# Altium PCB PCB1.PcbDoc (part 2 of 2)
Units mm, origin at the board's own origin, x right, y up, seen from the top; angles counter-clockwise.
Board outline 95 x 95 mm, 2 copper layers (Top Layer, Bottom Layer); 186 components, 106 nets, 634 pads, 261 vias.
Unrouted connection lines stored in the file: 17.
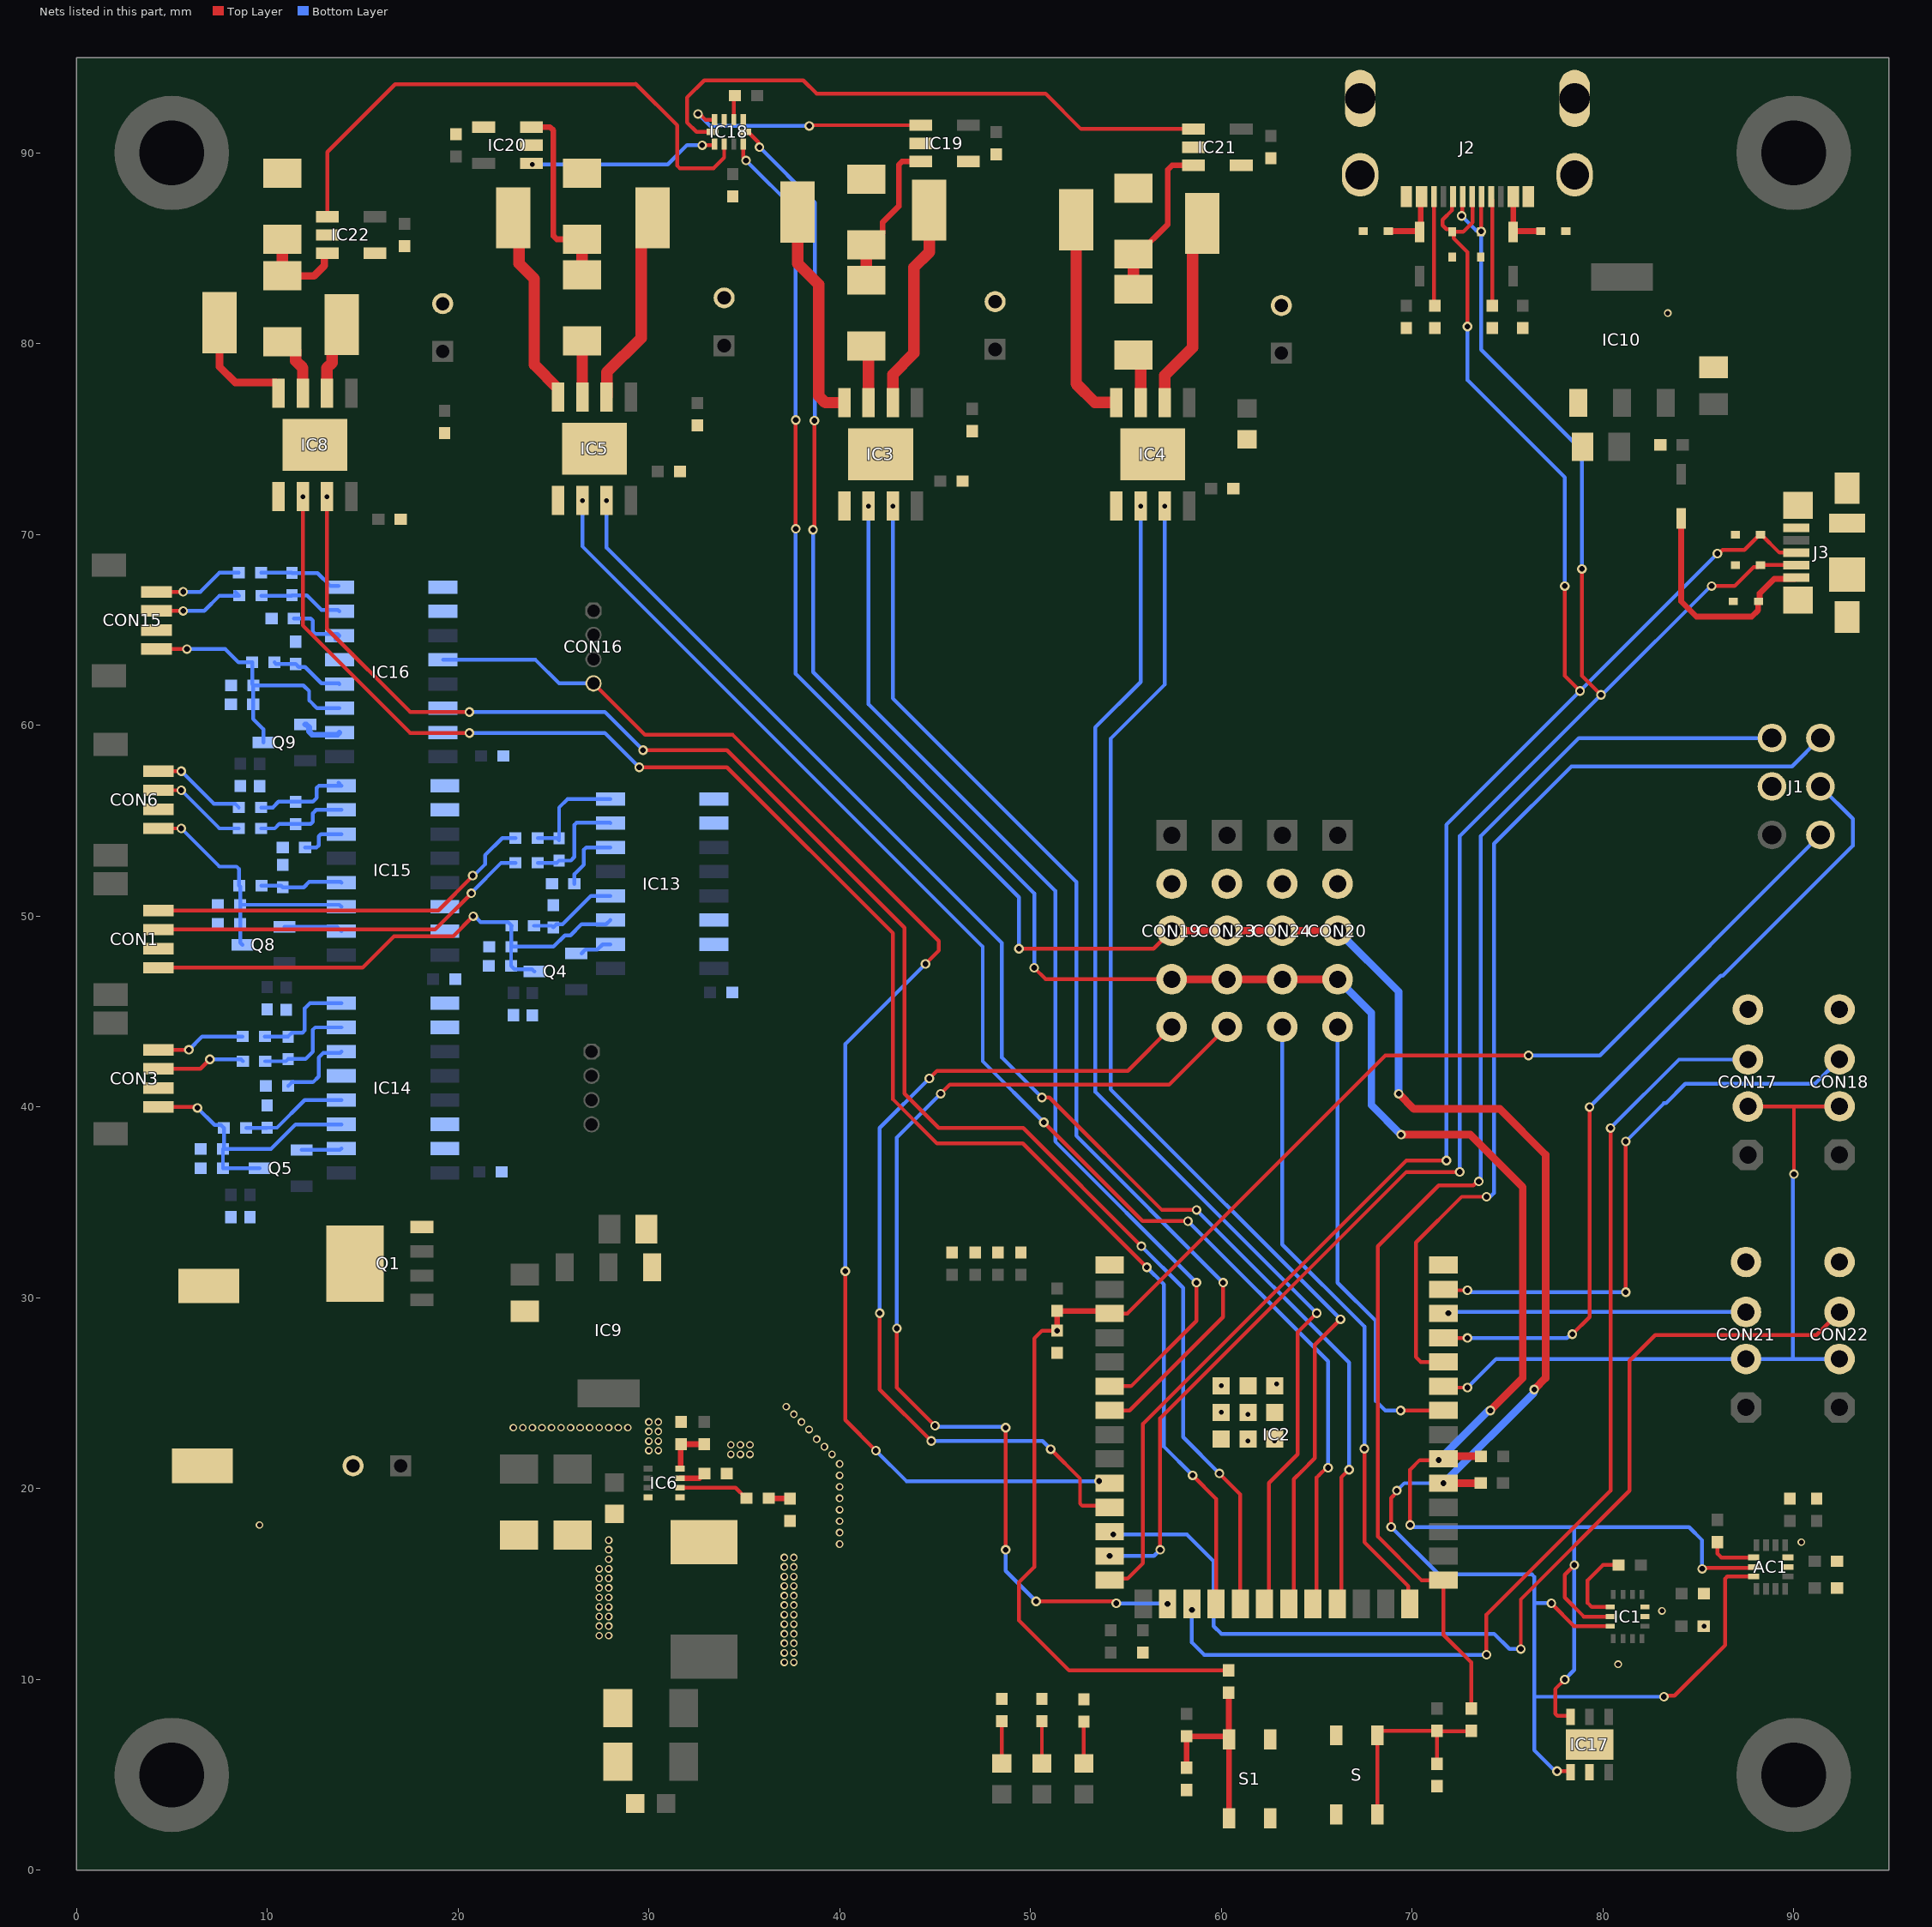
[diagram p2: the nets of this part, all layers, seen from the top]

## Via types
v1: diameter 0.5, hole 0.3, Top Layer to Bottom Layer, tented both sides, 150 vias
v2: diameter 0.4, hole 0.25, Top Layer to Bottom Layer, tented both sides, 110 vias
v3: diameter 0.6, hole 0.3, Top Layer to Bottom Layer, tented both sides, 1 vias

## Nets (pads, with @x,y where several pads share a name; then routed paths per layer and width w, separated by ;. In a path a pad name is that pad's centre, name@x,y a point inside that pad or via, vN(x,y) a via of type N, cw(c..) or ccw(c..) an arc to the next point about the centre after c; other vN are vias at no path point) (continued)
DAT4: CON16.4 IC2.10 IC16.12 | length 73.8
  Top Layer w0.2: CON16.4@27.1,62.2 29.8,59.5 34.4,59.5 45.2,48.7 45.2,48.2 v1(44.5,47.5) ; v1(40.3,31.4) 40.3,23.6 v1(41.9,22)
  Bottom Layer w0.2: IC16.12@19.212,63.435 24.065,63.435 25.3,62.2 CON16.4@27.1,62.2 ; v1(40.3,31.4) 40.3,43.3 v1(44.5,47.5) ; v1(41.9,22) 43.5,20.4 v1(53.6,20.4)
ECHO1: CON17.3 IC2.17 | length 56.4
  Top Layer w0.2: v1(73.9,11.3) 73.9,13.4 80.4,19.9 v1(80.4,38.9)
  Bottom Layer w0.2: v1(58.462,13.645) 58.462,11.938 59.1,11.3 v1(73.9,11.3) ; v1(80.4,38.9) 83.99,42.49 CON17.3@87.6,42.49
ECHO2: CON21.3 IC2.38 | length 15.6
  Bottom Layer w0.2: v1(71.9,29.2) 71.96,29.26 CON21.3@87.5,29.26
ECHO3: CON18.3 IC2.39 | length 30.5
  Top Layer w0.2: IC2.39@71.65,30.45 71.7,30.4 v1(72.9,30.4) ; v1(81.2,30.3) v1(81.2,38.2)
  Bottom Layer w0.2: v1(72.9,30.4) 72.981,30.4 73.081,30.3 v1(81.2,30.3) ; v1(81.2,38.2) 83.2,40.2 83.3,40.2 84.316,41.216 91.116,41.216 CON18.3@92.4,42.5
ECHO4: CON22.3 IC2.12 | length 55.4
  Top Layer w0.2: v1(75.7,11.6) 75.7,14.2 81.4,19.9 81.4,26.7 82.746,28.046 91.186,28.046 CON22.3@92.4,29.26
  Bottom Layer w0.2: v1(54.336,17.609) 54.345,17.6 58.2,17.6 59.6,16.2 59.6,12.8 60,12.4 74.3,12.4 75.1,11.6 v1(75.7,11.6)
EN: C26.1 IC2.3 J1.1 R5.1 R23.1 | length 80
  Top Layer w0.2: v1(51.4,28.284) 50.616,28.284 50.2,27.868 50.2,15.9 49.4,15.1 49.4,13.1 52.019,10.481 R23.1@60.387,10.481 ; IC2.3@54.15,29.18 54.153,29.183 55.083,29.183 68.6,42.7 v1(76.1,42.7)
  Top Layer w0.3: v1(51.4,28.284) 51.4,28.4 R5.1@51.4,29.316 54.014,29.316 IC2.3@54.15,29.18
  Bottom Layer w0.2: v1(76.1,42.7) 79.84,42.7 J1.1@91.4,54.26
GND: AC1.6 AC1.7 C1.2 C2.2 C3.2 C4.2 C6.2 C7.2 C8.2 C9.2 C10.2 C11.2 C12.2 C13.2 C14.2 C15.2 C16.2 C17.2 C18.2 C19.2 C20.2 C21.2 C22.2 C23.2 C24.2 C25.2 C26.2 C27.2 C28.2 C29.2 C30.2 C31.2 C32.2 C33.2 C34.2 C35.2 C36.2 C37.2 C38.2 C39.2 C40.2 C41.2 C42.2 C43.2 C44.2 C45.2 C46.2 C47.2 C48.1 C49.1 C52.2 C53.2 C54.2 C55.2 C56.2 C57.2 C58.2 C59.2 C60.1 C61.1 C64.1 C65.2 C66.2 C67.2 C68.2 C69.2 C70.2 CON1.2 CON3.2 CON6.2 CON14.1 CON15.2 CON17.4 CON18.4 CON19.2 CON20.2 CON21.4 CON22.4 CON23.2 CON24.2 D4.1 D5.1 D6.1 D7.1 D8.1 D9.1 D10.1 IC1.6 IC1.7 IC2.1 IC2.40 IC2.41 IC2.42 IC2.43 IC2.44 IC2.45 IC2.46 IC2.47 IC2.48 IC2.49 IC3.1 IC3.9 IC4.1 IC4.9 IC5.1 IC5.9 IC6.4 IC8.1 IC8.9 IC9.1 IC10.1 IC13.9 IC13.10 IC13.14 IC13.15 IC14.5 IC14.9 IC14.10 IC14.14 IC14.15 IC15.9 IC15.10 IC15.14 IC15.15 IC16.5 IC16.9 IC16.10 IC16.14 IC16.15 IC17.2 IC17.7 IC18.1 IC18.3 IC19.2 IC19.4 IC20.2 IC20.4 IC21.2 IC21.4 IC22.2 IC22.4 J1.4 J2.A1 J2.A12 J2.MH1 J2.MH2 J2.MH3 J2.MH4 J3.5 J3.MP1 J3.MP2 J3.MP3 J3.MP4 J3.MP5 J3.MP6 Q1.4 R3.1 R7.1 R8.1 R9.2 R10.2 R11.2 R12.1 R13.1 R14.2 R15.1 R18.1 R20.1 R21.1 R26.1 R27.1 R32.1 R33.1 R36.1 R37.1 S1.1 S1.2 S.1 S.2
  other v2: 80.8,10.8 37.1,10.9 37.6,10.9 37.1,11.4 37.6,11.4 37.1,11.9 37.6,11.9 27.4,12.3 27.9,12.3 37.1,12.4 37.6,12.4 27.4,12.8 27.9,12.8 85.3,12.8 37.1,12.9 37.6,12.9 27.4,13.3 27.9,13.3 37.1,13.4 37.6,13.4 83.1,13.6 27.4,13.8 27.9,13.8 37.1,13.9 37.6,13.9 27.4,14.3 27.9,14.3 37.1,14.4 37.6,14.4 27.4,14.8 27.9,14.8 37.1,14.9 37.6,14.9 27.4,15.3 27.9,15.3 37.1,15.4 37.6,15.4 27.4,15.8 27.9,15.8 37.1,15.9 37.6,15.9 27.9,16.3 37.1,16.4 37.6,16.4 27.9,16.8 40,17.1 90.4,17.2 27.9,17.3 40,17.7 9.6,18.1 40,18.3 40,18.9 40,19.5 40,20.1 40,20.7 40,21.3 34.3,21.8 34.8,21.8 35.3,21.8 39.6,21.8 30,22 30.5,22 39.2,22.2 34.3,22.3 34.8,22.3 35.3,22.3 30,22.5 30.5,22.5 61.4,22.5 62.8,22.5 38.8,22.6 30,23 30.5,23 38.4,23.1 22.9,23.2 23.4,23.2 23.9,23.2 24.4,23.2 24.9,23.2 25.4,23.2 25.9,23.2 26.4,23.2 26.9,23.2 27.4,23.2 27.9,23.2 28.4,23.2 28.9,23.2 30,23.5 30.5,23.5 38,23.5 37.6,23.9 61.4,23.9 60,24 37.2,24.3 60,25.4 62.9,25.5 83.4,81.6
I1: IC18.4 IC19.1 | length 12.9
  Top Layer w0.2: v1(32.58,92.041) 32.661,92.041 32.964,91.738 IC18.4@33.45,91.738 ; v1(38.413,91.412) 38.451,91.45 IC19.1@44.25,91.45
  Bottom Layer w0.2: v1(32.58,92.041) 33.208,91.412 v1(38.413,91.412)
I2: IC18.5 IC21.1 | length 30.8
  Top Layer w0.2: IC18.5@33.34,91.1 32.5,91.1 32,91.6 32,92.9 32.9,93.8 38.1,93.8 38.8,93.1 50.8,93.1 52.65,91.25 IC21.1@58.55,91.25
I3: IC18.6 IC20.1 | length 10
  Top Layer w0.2: v1(32.8,90.4) 33.4,90.4 33.45,90.45 IC18.6@33.45,90.462
  Bottom Layer w0.2: v2(23.9,89.4) 31,89.4 32,90.4 v1(32.8,90.4)
I4: IC18.7 IC22.1 | length 29.7
  Top Layer w0.2: IC22.1@13.15,86.65 13.15,90.05 16.7,93.6 29.3,93.6 29.317,93.617 31.5,91.434 31.5,89.317 31.617,89.2 33.4,89.2 33.95,89.75 IC18.7@33.95,90.462
IO0: IC2.27 J1.6 R22.1 | length 69.2
  Top Layer w0.2: R22.1@73.1,8.484 73.1,10.9 71.65,12.35 IC2.27@71.65,15.21 70.49,15.21 68.2,17.5 68.2,32.7 71.4,35.9 73.219,35.9 73.419,36.1 v1(73.5,36.1)
  Bottom Layer w0.2: v1(73.5,36.1) 73.6,36.2 73.6,54.2 78.74,59.34 J1.6@88.86,59.34
NetAC1_12: AC1.12 R47.1 | length 2.6
  Top Layer w0.2: R47.1@86,17.2 86,16.6 86.2,16.4 AC1.12@87.9,16.4
NetC4_1: C4.1 IC6.7 | length 1.4
  Top Layer w0.3: IC6.7@31.638,20.55 32.648,20.55 32.898,20.8 C4.1@32.916,20.8
NetC5_1: C5.1 R4.1 | length 1.1
  Top Layer w0.3: R4.1@36.284,19.5 36.292,19.492 37.392,19.492 C5.1@37.4,19.484
NetC5_2: C5.2 IC6.5 L1.1
NetC27_1: C27.1 R16.1 R22.2 S.3 S.4 | length 10.9
  Top Layer w0.2: S.3@68.175,2.925 68.175,7.091 68.4,7.316 R16.1@71.3,7.316 ; C27.1@71.3,5.584 71.3,7.298 73.083,7.298 R22.2@73.1,7.316
NetC31_1: C31.1 R17.1 R23.2 S1.3 S1.4 | length 10.3
  Top Layer w0.3: C31.1@58.188,5.381 R17.1@58.188,7.028 S1.3@60.256,7.028 ; R23.2@60.387,9.313 60.4,9.3 60.4,6.884 S1.3@60.413,6.872 S1.4@60.413,2.722
NetC44_1: C44.1 C45.1 CON1.1 IC13.3 Q4.3 R24.2 | length 29.1
  Top Layer w0.2: CON1.1@4.3,47.3 15,47.3 16.65,48.95 19.75,48.95 v1(20.8,50)
  Bottom Layer w0.2: v1(20.8,50) 20.881,50 21.181,49.7 22.616,49.7 R24.2@22.816,49.5 22.8,49.484 C45.1@22.8,48.4 ; Q4.3@24,47.1 23.883,47.217 22.967,47.217 C44.1@22.784,47.4 22.784,48.384 C45.1@22.8,48.4 ; IC13.3@27.988,49.795 27.766,49.573 26.473,49.573 25.9,49 25.6,49 25,48.4 C45.1@22.8,48.4
NetC46_1: C46.1 C47.1 CON3.1 IC14.3 Q5.3 R25.2 | length 14.7
  Top Layer w0.2: CON3.1@4.3,40 6.304,40 v1(6.349,39.955)
  Bottom Layer w0.2: v1(6.349,39.955) 7.247,39.057 7.574,39.057 R25.2@7.732,38.9 7.732,37.847 C46.1@7.684,37.8 ; Q5.3@9.6,36.8 C47.1@7.684,36.8 C46.1@7.684,37.8 ; IC14.3@13.888,39.095 11.495,39.095 10.2,37.8 C46.1@7.684,37.8
NetC48_2: C48.2 IC13.6 | length 3.4
  Bottom Layer w0.2: C48.2@26.1,51.7 26.1,52.2 26.6,52.7 26.6,53.488 26.717,53.605 IC13.6@27.988,53.605
NetC49_2: C49.2 IC14.6 | length 4.1
  Bottom Layer w0.2: C49.2@11.1,41.1 11.3,41.3 12.4,41.3 12.7,41.6 12.7,42.6 12.943,42.843 13.826,42.843 IC14.6@13.888,42.905
NetC50_1: C50.1 IC13.8 R30.1 | length 5.7
  Bottom Layer w0.2: R30.1@24.184,54.1 25.184,54.1 C50.1@25.3,53.984 ; C50.1@25.3,54.084 25.3,55.7 25.745,56.145 IC13.8@27.988,56.145
NetC50_2: C50.2 IC13.7 R28.1 | length 5.7
  Bottom Layer w0.2: R28.1@24.184,52.8 25.184,52.8 C50.2@25.3,52.916 25.916,52.916 26.1,53.1 26.1,54.783 26.217,54.9 27.963,54.9 IC13.7@27.988,54.875
NetC51_1: C51.1 IC14.8 R31.1 | length 5.4
  Bottom Layer w0.2: R31.1@9.884,43.7 11.084,43.7 C51.1@11.1,43.684 11.1,43.7 11.3,43.9 11.856,43.9 11.973,44.017 11.973,45.173 12.245,45.445 IC14.8@13.888,45.445
NetC51_2: C51.2 IC14.7 R29.1 | length 5.4
  Bottom Layer w0.2: R29.1@9.9,42.4 10.984,42.4 C51.2@11.1,42.516 12.016,42.516 12.4,42.9 12.4,44.058 12.517,44.175 IC14.7@13.888,44.175
NetC56_1: C56.1 C57.1 CON6.1 IC15.3 Q8.3 R34.2 | length 14.5
  Top Layer w0.2: CON6.1@4.3,54.6 v1(5.5,54.6)
  Bottom Layer w0.2: v1(5.5,54.6) 7.5,52.6 8.4,52.6 8.532,52.468 R34.2@8.532,51.6 8.584,51.547 C56.1@8.584,50.6 ; Q8.3@8.7,48.5 8.584,48.616 C57.1@8.584,49.6 C56.1@8.584,50.6 ; IC15.3@13.888,50.495 13.783,50.6 C56.1@8.584,50.6
NetC58_1: C58.1 C59.1 CON15.1 IC16.3 Q9.3 R35.2 | length 14.9
  Top Layer w0.2: CON15.1@4.3,64 v1(5.8,64)
  Bottom Layer w0.2: v1(5.8,64) 7.8,64 8.5,63.3 R35.2@9.216,63.3 9.216,62.168 C58.1@9.284,62.1 ; Q9.3@9.8,59.1 9.8,59.8 9.268,60.332 C59.1@9.268,61.1 9.268,62.084 C58.1@9.284,62.1 ; IC16.3@13.788,60.895 12.622,60.895 12.2,61.317 12.2,61.8 11.9,62.1 C58.1@9.284,62.1
NetC60_2: C60.2 IC15.6 | length 2.5
  Bottom Layer w0.2: C60.2@11.984,53.6 12.583,53.6 12.7,53.717 12.7,54.188 12.817,54.305 IC15.6@13.888,54.305
NetC61_2: C61.2 IC16.6 | length 3.4
  Bottom Layer w0.2: C61.2@11.4,65.6 12.283,65.6 12.4,65.483 12.4,64.917 12.517,64.8 13.693,64.8 IC16.6@13.788,64.705 IC16.6@13.583,64.5
NetC62_1: C62.1 IC15.8 R40.1 | length 5.2
  Bottom Layer w0.2: R40.1@9.684,55.7 10.3,55.7 10.6,56 C62.1@11.5,56 12.4,56 12.6,56.2 12.6,56.728 12.717,56.845 IC15.8@13.888,56.845 IC15.8@13.733,57
NetC62_2: C62.2 IC15.7 R38.1 | length 4.9
  Bottom Layer w0.2: R38.1@9.684,54.6 10.4,54.6 10.632,54.832 C62.2@11.5,54.832 12.283,54.832 12.4,54.949 12.4,55.4 12.575,55.575 IC15.7@13.888,55.575
NetC63_1: C63.1 IC16.8 R41.1 | length 4.3
  Bottom Layer w0.2: R41.1@9.684,68 11.284,68 C63.1@11.3,67.984 12.636,67.984 13.32,67.3 IC16.8@13.733,67.3
NetC63_2: C63.2 IC16.7 R39.1 | length 4.4
  Bottom Layer w0.2: R39.1@9.7,66.8 11.284,66.8 C63.2@11.3,66.816 12.084,66.816 12.843,66.057 13.706,66.057 IC16.7@13.788,65.975
NetCON1_3: CON1.3 R28.2 | length 20.2
  Top Layer w0.2: CON1.3@4.3,49.3 18.8,49.3 v1(20.7,51.2)
  Bottom Layer w0.2: v1(20.7,51.2) 20.7,51.234 22.266,52.8 R28.2@23.016,52.8
NetCON1_4: CON1.4 R30.2 | length 20.6
  Top Layer w0.2: CON1.4@4.3,50.3 18.969,50.3 20.773,52.104 v1(20.773,52.127)
  Bottom Layer w0.2: v1(20.773,52.127) 20.827,52.127 21.417,52.717 21.417,53.2 22.317,54.1 R30.2@23.016,54.1
NetCON2_1: CON2.1 IC3.8 | length 11.6
  Top Layer w0.6: CON2.1@37.8,86.9 37.8,84.2 38.9,83.1 38.9,77.263 39.251,76.912 IC3.8@40.245,76.912
NetCON3_3: CON3.3 R29.2 | length 4.7
  Top Layer w0.2: CON3.3@4.3,42 6.5,42 v1(7,42.5)
  Bottom Layer w0.2: v1(7,42.5) 8.632,42.5 R29.2@8.732,42.4
NetCON3_4: CON3.4 R31.2 | length 4.7
  Top Layer w0.2: CON3.4@4.3,43 v1(5.9,43)
  Bottom Layer w0.2: v1(5.9,43) 6.6,43.7 R31.2@8.716,43.7
NetCON4_1: CON4.1 Q1.5_8
NetCON6_3: CON6.3 R38.2 | length 5
  Top Layer w0.2: CON6.3@4.3,56.6 v1(5.5,56.6)
  Bottom Layer w0.2: v1(5.5,56.6) 7.5,54.6 R38.2@8.516,54.6
NetCON6_4: CON6.4 R40.2 | length 5
  Top Layer w0.2: CON6.4@4.3,57.6 v1(5.5,57.6)
  Bottom Layer w0.2: v1(5.5,57.6) 7.2,55.9 8.316,55.9 R40.2@8.516,55.7
NetCON7_1: CON7.1 IC3.6 | length 10.9
  Top Layer w0.6: IC3.6@42.785,76.912 42.785,78.385 43.9,79.5 43.9,84 44.7,84.8 CON7.1@44.7,87
NetCON8_1: CON8.1 IC4.8 | length 11.1
  Top Layer w0.6: CON8.1@52.4,86.5 52.4,77.9 53.382,76.918 IC4.8@54.506,76.918
NetCON9_1: CON9.1 IC4.6 | length 10.2
  Top Layer w0.6: IC4.6@57.046,76.918 57.046,78.346 58.5,79.8 58.5,85.8 CON9.1@59,86.3
NetCON10_1: CON10.1 IC5.8 | length 10.4
  Top Layer w0.6: CON10.1@22.9,86.6 23.2,86.3 23.2,84.2 24,83.4 24,78.895 25.245,77.649 IC5.8@25.245,77.212
NetCON11_1: CON11.1 IC5.6 | length 10.1
  Top Layer w0.6: IC5.6@27.785,77.212 27.81,77.237 27.81,78.51 29.6,80.3 CON11.1@29.6,86.6
NetCON12_1: CON12.1 IC8.8 | length 6.2
  Top Layer w0.4: CON12.1@7.5,81.1 7.5,78.8 8.325,77.975 10.47,77.975 10.595,77.85 IC8.8@10.595,77.412
NetCON13_1: CON13.1 IC8.6 | length 3.9
  Top Layer w0.6: IC8.6@13.135,77.412 13.135,78.735 13.399,78.999 13.399,80.499 CON13.1@13.9,81
NetCON15_3: CON15.3 R39.2 | length 4.8
  Top Layer w0.2: CON15.3@4.3,66 v1(5.6,66)
  Bottom Layer w0.2: v1(5.6,66) 6.7,66 7.5,66.8 R39.2@8.532,66.8 R39.2@8.332,67
NetCON15_4: CON15.4 R41.2 | length 4.6
  Top Layer w0.2: CON15.4@4.3,67 v1(5.6,67)
  Bottom Layer w0.2: v1(5.6,67) 6.5,67 7.5,68 R41.2@8.516,68
NetD1_2: D1.2 R12.2 | length 2.2
  Top Layer w0.2: D1.2@48.5,5.613 R12.2@48.5,7.816
NetD2_2: D2.2 R13.2 | length 2.2
  Top Layer w0.2: D2.2@52.8,5.613 R13.2@52.8,7.8
NetD3_2: D3.2 R15.2 | length 2.2
  Top Layer w0.2: D3.2@50.6,5.613 R15.2@50.6,7.816
NetD6_2: D6.2 IC12.2 J2.A9 | length 3.4
  Top Layer w0.3: D6.2@68.76,85.9 70.362,85.9 IC12.2@70.4,85.862 70.45,85.912 70.45,87.55 J2.A9@70.5,87.6
NetD7_2: D7.2 IC7.2 J2.A4 | length 3.2
  Top Layer w0.3: J2.A4@75.3,87.6 IC7.2@75.3,85.862 75.338,85.9 D7.2@76.74,85.9
NetD10_2: D10.2 IC11.2 J3.1 | length 12
  Top Layer w0.3: IC11.2@84.1,70.838 84.1,66.5 84.9,65.7 87.8,65.7 88.142,66.042 88.142,66.482 D10.2@88.16,66.5 88.168,66.5 88.218,66.55 88.218,66.918 88.975,67.675 90.065,67.675 J3.1@90.14,67.75
NetIC1_12: IC1.12 R48.1 | length 4.4
  Top Layer w0.2: IC1.12@80.387,13.8 79.417,13.8 79.2,14.017 79.2,15.2 80,16 R48.1@80.816,16
NetIC3_7: IC3.7 R43.1 | length 3
  Top Layer w0.6: R43.1@41.4,79.873 41.515,79.758 IC3.7@41.515,76.912
NetIC4_7: IC4.7 R45.1 | length 2.6
  Top Layer w0.6: R45.1@55.4,79.4 55.776,79.024 IC4.7@55.776,76.918
NetIC5_7: IC5.7 R44.1 | length 2.9
  Top Layer w0.6: R44.1@26.5,80.146 26.515,80.131 IC5.7@26.515,77.212
NetIC6_6: IC6.6 R4.2 | length 3.7
  Top Layer w0.2: IC6.6@31.638,20.05 34.548,20.05 35.098,19.5 R4.2@35.116,19.5
NetIC6_8: IC6.8 R6.2 R7.2 | length 2.5
  Top Layer w0.3: IC6.8@31.638,21.05 31.669,21.05 31.669,22.301 R7.2@31.7,22.332 R6.2@32.9,22.332
NetIC8_7: IC8.7 R46.1 | length 3.3
  Top Layer w0.6: R46.1@10.8,80.1 11.038,80.1 11.5,79.638 11.5,79.1 11.865,78.735 IC8.7@11.865,77.412
NetIC13_2: IC13.2 Q4.1 | length 1.7
  Bottom Layer w0.2: Q4.1@26.475,48.05 26.675,48.25 27.3,48.25 27.575,48.525 IC13.2@27.988,48.525
NetIC13_4: IC13.4 R24.1 R26.2 | length 4.7
  Bottom Layer w0.2: R24.1@23.984,49.5 24.916,49.5 R26.2@25,49.416 25.163,49.579 25.479,49.579 26.965,51.065 IC13.4@27.988,51.065
NetIC14_2: IC14.2 Q5.1 | length 2.1
  Bottom Layer w0.2: Q5.1@11.8,37.75 13.813,37.75 IC14.2@13.888,37.825
NetIC14_4: IC14.4 R25.1 R27.2 | length 5.6
  Bottom Layer w0.2: R25.1@8.9,38.9 9.984,38.9 R27.2@10,38.916 10.516,38.916 11.965,40.365 IC14.4@13.888,40.365
NetIC15_2: IC15.2 Q8.1 | length 3.1
  Bottom Layer w0.2: Q8.1@10.9,49.45 13.663,49.45 IC15.2@13.888,49.225
NetIC15_4: IC15.4 R34.1 R36.2 | length 4.4
  Bottom Layer w0.2: R34.1@9.7,51.6 10.732,51.6 R36.2@10.816,51.516 11.916,51.516 12.2,51.8 13.853,51.8 IC15.4@13.888,51.765
NetIC16_2: IC16.2 Q9.1 | length 2.2
  Bottom Layer w0.3: Q9.1@12,60.05 12.05,60.05 12.2,59.9 12.2,59.676 12.359,59.517 13.68,59.517 IC16.2@13.788,59.625
NetIC16_4: IC16.4 R35.1 R37.2 | length 3.9
  Bottom Layer w0.2: R35.1@10.384,63.3 10.468,63.216 R37.2@11.5,63.216 11.655,63.06 11.983,63.06 12.843,62.201 13.752,62.201 IC16.4@13.788,62.165
NetIC18_2: IC18.2 R42.1 | length 1.3
  Top Layer w0.2: IC18.2@34.45,91.738 34.45,92.934 R42.1@34.516,93
NetIC19_3: IC19.3 R9.1 R43.2 | length 8.1
  Top Layer w0.3: R9.1@41.4,85.173 41.638,85.173 42.25,85.785 42.25,86.35 43.1,87.2 43.1,89.374 43.276,89.55 IC19.3@44.25,89.55
  Top Layer w0.6: R43.2@41.4,83.327 R9.1@41.4,85.173
NetIC20_3: IC20.3 R14.1 R44.2 | length 10.2
  Top Layer w0.3: IC20.3@23.85,91.35 24.824,91.35 25,91.174 25,85.649 25.176,85.473 R14.1@26.5,85.473
  Top Layer w0.6: R44.2@26.5,83.6 R14.1@26.5,85.473
NetIC21_3: IC21.3 R10.1 R45.2 | length 8.6
  Top Layer w0.3: R10.1@55.4,84.7 55.638,84.7 57.2,86.262 57.2,89.124 57.426,89.35 IC21.3@58.55,89.35
  Top Layer w0.6: R45.2@55.4,82.854 R10.1@55.4,84.7
NetIC22_3: IC22.3 R11.1 R46.2 | length 5.1
  Top Layer w0.4: R46.2@10.8,83.554 12.454,83.554 13,84.1 13,84.65 13.1,84.75 IC22.3@13.15,84.75
  Top Layer w0.6: R46.2@10.8,83.554 R11.1@10.8,85.473
NetJ2_A5: J2.A5 R18.2 | length 5.6
  Top Layer w0.2: J2.A5@74.15,87.6 74.2,87.55 R18.2@74.2,81.984
NetJ2_B5: J2.B5 R21.2 | length 5.6
  Top Layer w0.2: J2.B5@71.15,87.6 71.15,82.034 R21.2@71.2,81.984
PWM1: IC2.6 IC3.2 | length 55.8
  Top Layer w0.2: IC2.6@54.15,25.37 55.27,25.37 58.7,28.8 v1(58.7,30.8)
  Bottom Layer w0.2: v2(41.515,71.488) 41.515,61.115 51.3,51.33 51.3,38.2 v1(58.7,30.8)
PWM2: IC2.7 IC3.3 | length 57.6
  Top Layer w0.2: IC2.7@54.15,24.1 55.2,24.1 60.1,29 v1(60.1,30.8)
  Bottom Layer w0.2: v2(42.785,71.488) 42.785,61.415 52.4,51.8 52.4,38.5 v1(60.1,30.8)
PWM3: IC2.20 IC4.2 | length 64.5
  Top Layer w0.2: IC2.20@62.265,13.96 62.5,14.195 62.5,20.3 64,21.8 64,28.2 v1(65,29.2)
  Bottom Layer w0.2: v2(55.776,71.494) 55.776,62.276 53.4,59.9 53.4,40.8 v1(65,29.2)
PWM4: IC2.21 IC4.3 | length 64.8
  Top Layer w0.2: IC2.21@63.535,13.96 63.8,14.225 63.8,20.5 64.2,20.9 64.9,21.6 64.9,27.53 v1(66.248,28.878)
  Bottom Layer w0.2: v2(57.046,71.494) 57.046,62.146 54.2,59.3 54.2,40.926 v1(66.248,28.878)
PWM5: IC2.18 IC8.2 | length 89.2
  Top Layer w0.2: v2(11.865,71.988) 11.865,65.235 17.5,59.6 v1(20.6,59.6) ; v1(29.5,57.8) 34.1,57.8 42.8,49.1 42.8,40.4 45.1,38.1 49.6,38.1 v1(56.1,31.6) ; v1(58.5,20.7) 59.725,19.475 IC2.18@59.725,13.96
  Bottom Layer w0.2: v1(20.6,59.6) 27.7,59.6 v1(29.5,57.8) ; v1(56.1,31.6) 57,30.7 57,22.2 v1(58.5,20.7)
PWM6: IC2.19 IC8.3 | length 89
  Top Layer w0.2: v2(13.135,71.988) 13.135,65.065 17.5,60.7 v1(20.6,60.7) ; v1(29.7,58.7) 34.1,58.7 43.4,49.4 43.4,40.7 45.2,38.9 49.62,38.9 v1(55.81,32.71) ; v1(59.9,20.8) 60.995,19.705 IC2.19@60.995,13.96
  Bottom Layer w0.2: v1(20.6,60.7) 27.7,60.7 v1(29.7,58.7) ; v1(55.81,32.71) 58,30.52 58,22.7 v1(59.9,20.8)
PWM7: IC2.22 IC5.2 | length 75.8
  Top Layer w0.2: v1(50.7,39.2) 55.869,34.031 58.246,34.031 v1(58.257,34.02) ; IC2.22@64.805,13.96 65,14.155 65,20.583 65.117,20.7 65.119,20.7 65.519,21.1 v1(65.6,21.1)
  Bottom Layer w0.2: v2(26.515,71.788) 26.515,69.385 47.5,48.4 47.5,42.4 v1(50.7,39.2) ; v1(58.257,34.02) 65.6,26.677 v1(65.6,21.1)
PWM8: IC2.23 IC5.3 | length 75.5
  Top Layer w0.2: v1(50.6,40.5) 51,40.5 56.893,34.607 v1(58.705,34.607) ; IC2.23@66.075,13.96 66.3,14.185 66.3,20.6 v1(66.7,21)
  Bottom Layer w0.2: v2(27.785,71.788) 27.785,69.315 48.5,48.6 48.5,42.6 v1(50.6,40.5) ; v1(58.705,34.607) 66.7,26.612 v1(66.7,21)
RXD0: IC2.36 J1.5 | length 50.4
  Top Layer w0.2: IC2.36@71.65,26.64 70.46,26.64 70.2,26.9 70.2,32.9 72.6,35.3 v1(73.9,35.3)
  Bottom Layer w0.2: v1(73.9,35.3) 74.1,35.3 74.3,35.5 74.3,53.8 78.35,57.85 89.91,57.85 J1.5@91.4,59.34
SCL: AC1.13 CON19.4 CON20.4 CON23.4 CON24.4 IC1.13 IC2.32 IC17.6 IC18.10 R2.1 | length 141.8
  Top Layer w0.2: IC18.10@35.06,91.1 35.2,91.1 35.743,90.557 35.743,90.357 v1(35.8,90.3) ; v1(38.607,70.248) 38.682,70.323 v1(38.682,75.971) ; v1(50.2,47.3) 50.8,46.7 CON19.4@57.4,46.7 ; v1(69.9,18.1) 69.9,21 70.4,21.5 v1(71.4,21.5) ; v1(78,10) 77.5,9.5 77.5,8.217 77.617,8.1 78.25,8.1 IC17.6@78.3,8.05 ; v1@78.5,15.988 78,15.488 78,14.3 79,13.3 IC1.13@80.387,13.3 ; v1(85.2,15.8) 85.25,15.85 87.85,15.85 AC1.13@87.9,15.9
  Top Layer w0.4: CON19.4@57.4,46.7 CON23.4@60.3,46.7 CON24.4@63.2,46.7 CON20.4@66.1,46.7 ; v1(69.426,38.55) 73.05,38.55 75.8,35.8 75.8,25.8 v1(74.1,24.1) ; IC2.32@71.65,21.56 71.79,21.7 R2.1@73.616,21.7
  Bottom Layer w0.2: v1(35.8,90.3) 38.7,87.4 38.7,75.989 v1(38.682,75.971) ; v1(38.607,70.248) 38.607,62.793 50.2,51.2 v1(50.2,47.3) ; v1(69.9,18.1) 69.981,18.1 70.095,17.986 84.514,17.986 85.2,17.3 v1(85.2,15.8) ; v1(78,10) 78.5,10.5 78.5,17.886
  Bottom Layer w0.4: CON20.4@66.1,46.7 67.868,44.932 67.868,40.108 v1(69.426,38.55) ; v1(71.4,21.5) 73.981,24.081 74.081,24.081 v1(74.1,24.1)
  other v1: 78.5,16
SDA: AC1.14 CON19.3 CON20.3 CON23.3 CON24.3 IC1.14 IC2.31 IC17.1 IC18.9 R1.1 | length 150.9
  Top Layer w0.2: IC18.9@34.95,90.462 34.95,89.75 v1(35.1,89.6) ; v1(37.7,70.3) v1(37.7,76) ; v1(49.4,48.3) 56.46,48.3 CON19.3@57.4,49.24 ; v1(68.9,18) 68.9,19.519 69.2,19.819 v1(69.2,19.9) ; v1(77.3,14) 77.3,13.981 78.481,12.8 IC1.14@80.387,12.8 ; v1(77.6,5.2) 78.25,5.2 IC17.1@78.3,5.15 ; v1(83.2,9.1) 83.25,9.15 83.75,9.15 86.4,11.8 86.4,15.283 86.517,15.4 AC1.14@87.9,15.4
  Top Layer w0.4: CON19.3@57.4,49.24 CON23.3@60.3,49.24 CON24.3@63.2,49.24 CON20.3@66.1,49.24 ; v1(69.3,40.7) 70.1,39.9 74.6,39.9 77,37.5 77,25.802 76.4,25.202 v1(76.4,25.2) ; v1(71.65,20.29) 71.655,20.295 73.595,20.295 R1.1@73.6,20.3
  Bottom Layer w0.2: v1(35.1,89.6) 37.7,87 v1(37.7,76) ; v1(37.7,70.3) 37.7,62.7 49.4,51 v1(49.4,48.3) ; v1(68.9,18) 71.391,15.509 76.283,15.509 76.4,15.391 76.4,14.1 ; v1(69.2,19.9) 69.59,20.29 v1(71.65,20.29) ; v1@77.261,13.961 v1(77.3,14) 76.5,14 76.4,14.1 ; v1(77.6,5.2) 77.519,5.2 77.38,5.339 77.361,5.339 76.4,6.3 76.4,9.1 ; v1(83.2,9.1) 76.4,9.1 ; 76.4,9.1 76.4,14.1
  Bottom Layer w0.4: CON20.3@66.1,49.24 69.3,46.04 v1(69.3,40.7) ; v1(71.65,20.29) 76.381,25.021 76.381,25.181 v1(76.4,25.2)
SHUT1: CON19.5 IC2.11 | length 46.6
  Top Layer w0.2: v1(42.1,29.2) 42.1,25.2 v1(44.8,22.5) ; v1(44.7,41.5) 45.1,41.9 55.1,41.9 CON19.5@57.4,44.2 ; v1(51.063,22.07) 52.6,20.533 52.6,19.217 52.717,19.1 54.07,19.1 IC2.11@54.15,19.02
  Bottom Layer w0.2: v1(42.1,29.2) 42.1,38.9 v1(44.7,41.5) ; v1(44.8,22.5) 50.633,22.5 v1(51.063,22.07)
SHUT2: CON23.5 IC2.16 | length 56.1
  Top Layer w0.2: v1(43,28.4) 43,25.3 v1(45,23.3) ; v1(45.3,40.7) 45.773,41.173 57.273,41.173 CON23.5@60.3,44.2 ; v1(48.7,16.8) v1(48.7,23.2) ; v1(50.3,14.1) 54.319,14.1 54.419,14 v1(54.5,14)
  Bottom Layer w0.2: v1(43,28.4) 43,38.4 v1(45.3,40.7) ; v1(45,23.3) 45.05,23.25 48.65,23.25 v1(48.7,23.2) ; v1(48.7,16.8) 48.7,15.7 v1(50.3,14.1) ; v1(54.5,14) 54.52,13.98 57.165,13.98 v1(57.185,13.96)
SHUT3: CON20.5 IC2.34 | length 24.2
  Top Layer w0.2: v1(69.4,24.1) IC2.34@71.65,24.1
  Bottom Layer w0.2: CON20.5@66.1,44.2 66.1,30.8 68.1,28.8 68.1,24.6 68.6,24.1 v1(69.4,24.1)
SHUT4: CON24.5 IC2.26 | length 33
  Top Layer w0.2: v1(67.5,22.1) 67.5,17.2 69.807,14.893 69.807,14.038 IC2.26@69.885,13.96
  Bottom Layer w0.2: CON24.5@63.2,44.2 63.2,32.8 67.5,28.5 v1(67.5,22.1)
TRIG: CON17.2 CON18.2 CON21.2 CON22.2 IC2.35 | length 39.4
  Top Layer w0.2: IC2.35@71.65,25.37 71.72,25.3 v1(72.9,25.3) ; CON17.2@87.6,40.03 90.013,40.03 ; v1(90.013,36.486) 90.013,40.03 ; CON18.2@92.39,40.03 90.013,40.03
  Bottom Layer w0.2: v1(72.9,25.3) 74.4,26.8 89.95,26.8 ; v1(90.013,36.486) 89.95,36.423 89.95,26.8 ; CON22.2@92.4,26.8 89.95,26.8
TXD0: IC2.37 J1.3 | length 42.4
  Top Layer w0.2: IC2.37@71.65,27.91 71.66,27.9 v1(72.9,27.9) ; v1(78.4,28.1) 79.3,29 v1(79.3,40)
  Bottom Layer w0.2: v1(72.9,27.9) 78.119,27.9 78.319,28.1 v1(78.4,28.1) ; v1(79.3,40) 86.179,46.879 86.279,46.879 93.1,53.7 93.1,55.1 J1.3@91.4,56.8
USB_D+: D4.2 D9.2 IC2.14 J2.A6 J2.B6 J3.3 | length 105.3
  Top Layer w0.2: IC2.14@54.15,15.21 54.223,15.283 55.083,15.283 55.9,16.1 55.9,23.4 69.7,37.2 v1(71.8,37.2) ; J2.B6@72.15,87.6 72.15,87.3 72.1,87.25 72.1,87 71.6,86.5 71.6,86.2 71.8,86 72,86 72.1,85.9 D4.2@72.1,85.86 ; v1(72.9,80.9) 72.9,84.8 72.18,85.52 72.18,85.78 D4.2@72.1,85.86 ; J2.A6@73.15,87.6 73.15,87.28 73.18,87.25 73.18,86.357 72.683,85.86 D4.2@72.1,85.86 ; v1(78,67.3) 78,62.6 v1(78.8,61.8) ; v1(86,69) 86.067,69 86.267,69.2 87.42,69.2 88.22,70 D9.2@88.26,70 88.3,70 89.25,69.05 J3.3@90.14,69.05
  Bottom Layer w0.2: v1(71.8,37.2) 71.8,54.8 v1(78.8,61.8) v1(86,69) ; v1(72.9,80.9) 72.9,78.1 78,73 v1(78,67.3)
USB_D-: D5.2 D8.2 IC2.13 J2.A7 J2.B7 J3.2 | length 102.9
  Top Layer w0.2: v1(56.8,16.8) 56.8,23.7 69.7,36.6 v1(72.5,36.6) ; v1(72.6,86.7) 72.625,86.725 72.625,87.675 J2.A7@72.65,87.7 ; D5.2@73.6,85.86 D5.2@73.62,85.88 ; v1(73.62,85.885) D5.2@73.62,85.88 ; J2.B7@73.65,87.6 73.625,87.575 73.625,85.885 D5.2@73.62,85.88 ; v1(78.9,68.2) 78.9,62.6 v1(79.9,61.6) ; v1(85.7,67.3) 86.9,67.3 87.9,68.3 88.16,68.3 D8.2@88.26,68.4 90.04,68.4 90.09,68.45 J3.2@90.14,68.4
  Bottom Layer w0.2: v1(54.15,16.48) 56.48,16.48 v1(56.8,16.8) ; v1(72.5,36.6) 72.5,54.2 v1(79.9,61.6) 79.95,61.6 85.65,67.3 v1(85.7,67.3) ; v1(72.6,86.7) 73.028,86.272 73.358,85.942 73.563,85.942 v1(73.62,85.885) 73.62,79.682 78.9,74.402 v1(78.9,68.2)
pads on no net: AC1.1 AC1.2 AC1.3 AC1.4 AC1.9 AC1.10 AC1.11 CON1.A CON1.B CON3.A CON3.B CON6.A CON6.B CON15.A CON15.B IC1.1 IC1.2 IC1.3 IC1.4 IC1.9 IC1.10 IC1.11 IC2.24 IC2.25 IC2.28 IC2.29 IC2.30 IC2.33 IC6.1 IC6.2 IC9.4 IC10.4 IC13.5 IC13.13 IC14.13 IC15.5 IC15.13 IC16.13 IC17.3 IC17.4 J2.A8 J2.B8 J3.4

## Polygon pours and split planes (outlines as drawn)
GND on Top Layer "GND_L01_P061" (solid, pour order 61): 0,0 95,0 95,95 0,95
5V on Top Layer "5V_L01_P058" (solid, pour order 58): 27.1,30.5 27.1,34.9 27.2,35 28.8,35 28.8,30.5
12V on Top Layer (solid, pour order 57): 63.7,67.5 66.1,69.9 66.1,79.4 65.2,80.3 60.95,80.3 58.55,77.9 57.85,77.9 57.85,76 63.95,76 64.1,75.85 64.1,71.4 62.2,69.5 51.1,69.5 51.1,80.5 47.15,80.5 44.95,78.3 44.15,78.3 43.65,77.8 43.65,76 45.75,76 46.05,76.3 48.8,76.3 48.8,70.4 48.1,69.7 37,69.7 37,79.9 36.3,80.6 32.55,80.6 30.25,78.3 28.606,78.3 28.606,76.344 28.65,76.3 31.75,76.3 31.95,76.5 33.15,76.5 34.9,76.5 34.9,71.5 33.4,70 23.85,70 23.85,77.65 23.2,78.3 20.2,78.25 20.2,80.2 19.9,80.5 17.2,80.5 15.3,78.6 14.3,78.6 14,78.3 14,76.5 16.9,76.5 17.4,76 21.8,76 21.8,32.9 17.3,32.9 17.2,32.8 17.2,28.9 17,28.9 15.9,27.8 15.9,20.7 17,19.6 28.9,19.6 28.9,21.6 28.3,22.2 21.8,22.2 21.8,30.4 26.3,30.4 26.5,30.6 26.5,32.9 24.9,34.5 24.9,67.5
GND on Top Layer "GND_L01_P003" (solid, pour order 3): 3.3,27.9 3.3,32.9 6.4,36 17,36 17.3,35.7 17.3,33.4 17.5,33.2 19.5,33.2 19.7,33.4 19.7,39.3 0.8,39.3 0.8,18.4 2.8,16.4 26.1,16.4 27,15.5 27,2.8 27.1,2.7 29.9,2.7 29.9,13 30.3,13.4 30.3,19.7 29.6,19.7 29,19.1 16.2,19.1 15.3,20 15.3,27.9
GND on Top Layer "GND_L01_P027" (solid, pour order 27): 11.1,73.2 11.1,70.7 10.9,70.5 9.7,70.5 9.5,70.7 9.5,75.8 9.9,76.2 16.6,76.2 17.061,75.739 20.356,75.739 20.356,74.456 19.1,73.2
GND on Top Layer "GND_L01_P031" (solid, pour order 31): 25.65,70.9 25.673,70.923 25.673,72.823 25.85,73 29.05,73 31.15,75.1 32.85,75.1 33.15,75.4 33.15,76.2 32.15,76.2 31.95,76 24.85,76 24.65,75.8 24.65,70.9
GND on Top Layer "GND_L01_P039" (solid, pour order 39): 40.65,70.6 40.65,72.6 40.85,72.8 43.95,72.8 47.55,75.2 47.55,75.8 47.25,76.1 46.15,76.1 45.65,75.6 39.95,75.6 39.65,75.3 39.65,70.5 40.55,70.5
GND on Top Layer "GND_L01_P032" (solid, pour order 32): 54.95,70.6 54.95,72.5 55.15,72.7 57.928,72.7 62.15,74.6 62.15,75.7 58.15,75.7 53.95,75.7 53.95,70.6
3.3V on Top Layer "3.3V_L01_P002" (solid, pour order 2): 30.7,12.9 35.3,12.9 35.3,10.1 34.2,9 34.2,3.1 33.8,2.7 30.4,2.7 30.4,12.6
5V on Top Layer "5V_L01_P044" (solid, pour order 44): 82.5,77.9 82.5,75.9 87.5,75.9 87.6,76 87.6,77.9
NetCON4_1 on Top Layer "NETCON4_1_L01_P019" (solid, pour order 19): 4.5,31.8 4.5,29 9.7,29 16.6,29 16.6,29.2 16.7,29.3 16.6,29.4 16.6,34.7 7.4,34.7
NetC5_2 on Top Layer "NETC5_2_L01_P001" (solid, pour order 1): 31.3,19.8 31.3,19.3 30.8,18.8 30.8,15.7 30.9,15.6 34.9,15.6 37.1,17.8 37.9,17.8 37.9,18.8 36.7,18.8 33.5,18.8 32.5,19.8
GND on Bottom Layer "GND_L02_P062" (solid, pour order 62): 0,0 95,0 95,95 0,95

## Other copper
Bottom Layer:
  text "1" at 69.8,89.3 h1.52

## Silkscreen, mask and mechanical layers (free items; w line width, h text height)
Top Overlay:
  text "S+" at 6.201,66.714 h1.7
  text "S-" at 6.201,65.614 h1.7
  text "E-" at 6.2,64.4 h1.7
  text "E+" at 6.2,63.3 h1.7
  text "Smarthphone controlled self  / levelling system for caravan v3 /  / Q2 2025" at 40.6,59.7 h2
  text "S+" at 5.901,57.314 h1.7
  text "S-" at 5.901,56.214 h1.7
  text "E-" at 5.9,55 h1.7
  text "IO0       RX /  / GND     TX /  / 3.3V      EN" at 80.1,54.6 h1.4
  text "3.3V" at 52.6,53.915 h1.7
  text "E+" at 5.9,53.9 h1.7
  text "3.3V" at 52.621,53.907 h1.7
  text "GND" at 52.401,51.514 h1.7
  text "GND" at 52.422,51.506 h1.7
  text "S+" at 5.501,50.114 h1.7
  text "S-" at 5.501,49.014 h1.7
  text "SDA" at 52.501,48.914 h1.7
  text "SDA" at 52.522,48.906 h1.7
  text "E-" at 5.5,47.8 h1.7
  text "E+" at 5.5,46.7 h1.7
  text "SCL" at 52.501,46.314 h1.7
  text "SCL" at 52.522,46.306 h1.7
  text "GND" at 82.701,44.714 h1.7
  text "SHUT" at 52.501,43.814 h1.7
  text "SHUT" at 52.522,43.806 h1.7
  text "S+" at 5.801,42.814 h1.7
  text "ECHO" at 82.6,42.314 h1.7
  text "S-" at 5.801,41.714 h1.7
  text "E-" at 5.8,40.5 h1.7
  text "TRIG" at 82.601,39.714 h1.7
  text "E+" at 5.8,39.4 h1.7
  text "5V" at 82.701,37.115 h1.7
  text "GND" at 82.801,31.514 h1.7
  text "VCC" at 1.701,30.214 h1.7
  text "ECHO" at 82.7,29.114 h1.7
  text "TRIG" at 82.701,26.514 h1.7
  text "5V" at 82.801,23.915 h1.7
  text "GND" at 1.501,20.614 h1.7
  text "IO0" at 66.354,9.054 h1.52
  text "EN" at 61.954,8.954 h1.52
  text "5V" at 51.085,1.101 h1.7 r90
  text "12V" at 49,0.701 h1.7 r90
  text "3.3V" at 53.285,0.6 h1.7 r90